# Altium PCB PCB1.PcbDoc
Units mm, origin at the board's own origin, x right, y up, seen from the top; angles counter-clockwise.
Board outline 152.4 x 101.6 mm, 2 copper layers (Top Layer, Bottom Layer); 165 components, 127 nets, 643 pads, 1 vias.
Unrouted connection lines stored in the file: 359.
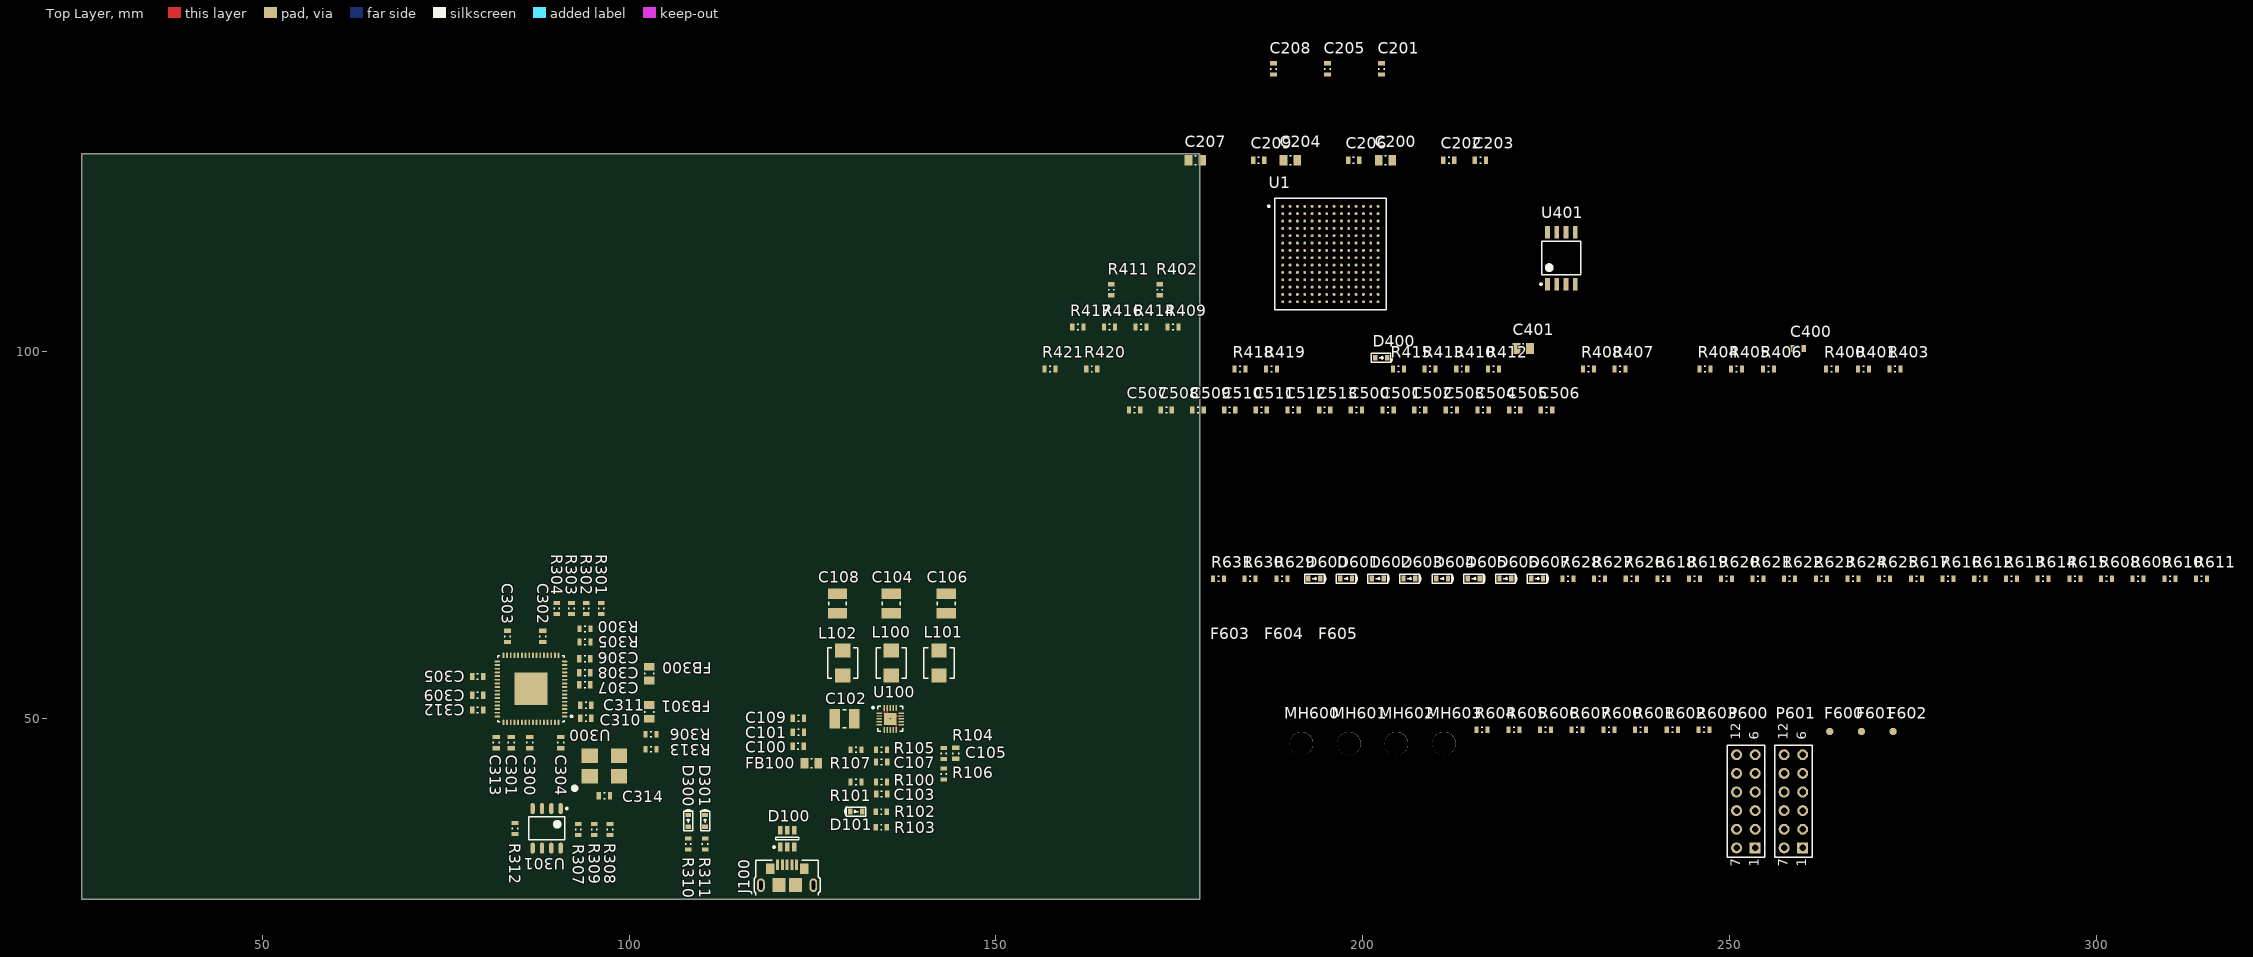
[diagram p0: Top Layer view]
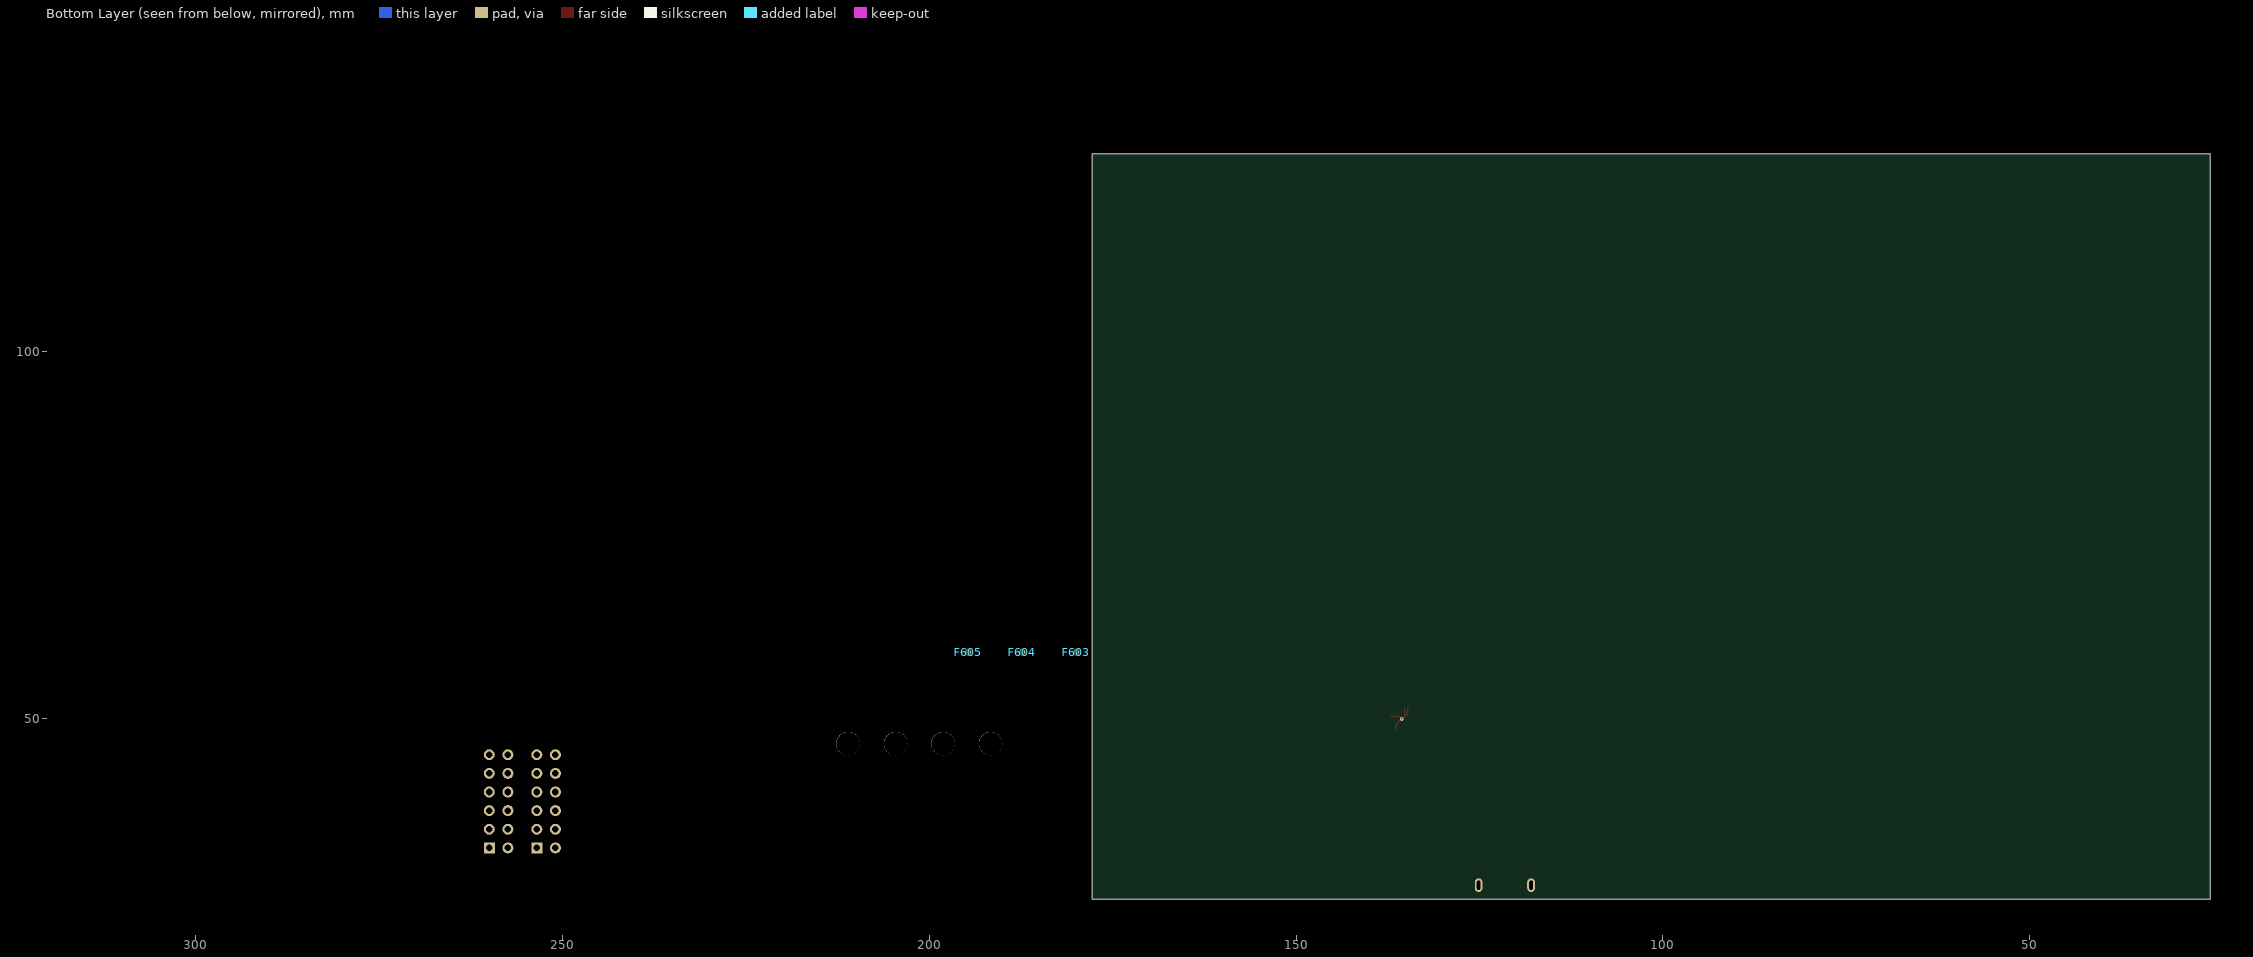
[diagram p1: Bottom Layer view, seen from below]

## Layer stack, top to bottom
Top Solder: solder mask 0.0102, Solder Resist, Dk 3.5
Top Layer: signal copper 0.0356
Dielectric 1: dielectric 0.32, FR-4, Dk 4.8
Bottom Layer: signal copper 0.0356
Bottom Solder: solder mask 0.0102, Solder Resist, Dk 3.5

## Board outline
25.4,25.4 177.8,25.4 177.8,127 25.4,127

## Design rules (kind name [scope] priority, off if disabled: settings)
Clearance [All] p1: gap=0.2 ignorepadtopadclearanceinfootprint=FALSE
DiffPairsRouting [All] p1: maxlimit=0.254 minlimit=0.254 mostfreqgap=0.254 toplayer_minwidth=0.381 toplayer_maxwidth=0.381 toplayer_prefwidth=0.381 bottomlayer_minwidth=0.381 bottomlayer_maxwidth=0.381 bottomlayer_prefwidth=0.381 maxuncoupledlength=12.7
FanoutControl Fanout_BGA [IsBGA] p1: bgadir=Out bgaviamode=Centered fanoutstyle=BGA fanoutdirection=Alternating viagrid=0.025 // Fanout_BGA (Default Rule)
PolygonConnect [All] p1: connectstyle=Relief reliefconductorwidth=0.254 reliefentries=4 polygonreliefangle="90 Angle" airgapwidth=0.254
RoomDefinition U_POWER_SUPPLY [InComponentClass('U_POWER_SUPPLY')] p1: confinementstyle=ConfineIn formatcopy=TRUE lockcomponents=FALSE outline 115.074,22.225 152.622,22.225 152.622,72.443 115.074,72.443
RoomDefinition U_GPIO_Connectors [InComponentClass('U_GPIO_Connectors')] p2: confinementstyle=ConfineIn formatcopy=TRUE lockcomponents=FALSE outline 178.816,25.781 319.544,25.781 319.544,80.391 178.816,80.391
RoomDefinition U_FPGA_BANKS [InComponentClass('U_FPGA_BANKS')] p3: confinementstyle=ConfineIn formatcopy=TRUE lockcomponents=FALSE outline 167.388,87.249 226.951,87.249 226.951,95.631 167.388,95.631
RoomDefinition U_FPGA_POWER [InComponentClass('U_FPGA_POWER')] p4: confinementstyle=ConfineIn formatcopy=TRUE lockcomponents=FALSE outline 162.306,123.573 234.95,123.573 234.95,145.671 162.306,145.671
RoomDefinition U_FPGA_CONFIG [InComponentClass('U_FPGA_CONFIG')] p5: confinementstyle=ConfineIn formatcopy=TRUE lockcomponents=FALSE outline 153.371,96.012 276.307,96.012 276.307,122.682 153.371,122.682
RoomDefinition U_USB [InComponentClass('U_USB')] p6: confinementstyle=ConfineIn formatcopy=TRUE lockcomponents=FALSE outline 115.064,71.249 70.36,71.249 70.36,27.432 115.064,27.432
RoutingVias [All] p1: holewidth=0.711 width=1.27 viastyle="Through Hole" minholewidth=0.15 minwidth=0.25 maxholewidth=0.711 maxwidth=1.27
ShortCircuit ShortCircuit_1 [All] p1: allowed=FALSE
ShortCircuit [All] p2: allowed=FALSE
SolderMaskExpansion [All] p1: expansion=0.102 istentingtop=FALSE
Width [All] p1: maxlimit=10 minlimit=0.1 preferedwidth=0.2 minimp=50.000000 maximp=50.000000 favimp=50.000000
27 further rules are at their usual default settings.

## Classes and differential pairs
component class U_GPIO_Connectors: D600 D601 D602 D603 D604 D605 D606 D607 F600 F601 F602 F603 F604 F605 MH600 MH601 MH602 MH603 P600 P601 R600 R601 R602 R603 R604 R605 R606 R607 R608 R609 R610 R611 R612 R613 R614 R615 R616 R617 R618 R619 R620 R621 R622 R623 R624 R625 R626 R627 R628 R629 R630 R631 SW?
component class U_FPGA_POWER: C200 C201 C202 C203 C204 C205 C206 C207 C208 C209
component class U_FPGA_CONFIG: C400 C401 D400 R400 R401 R402 R403 R404 R405 R406 R407 R408 R409 R410 R411 R412 R413 R414 R415 R416 R417 R418 R419 R420 R421 U1 U401
component class U_USB: C300 C301 C302 C303 C304 C305 C306 C307 C308 C309 C310 C311 C312 C313 C314 D300 D301 FB300 FB301 R300 R301 R302 R303 R304 R305 R306 R307 R308 R309 R310 R311 R312 R313 U300 U301
component class U_POWER_SUPPLY: C101 C102 C103 C104 C105 C106 C107 C108 C109 D100 D101 FB100 J100 L100 L101 L102 R100 R101 R102 R103 R104 R105 R106 R107 U100
component class U_FPGA_BANKS: C500 C501 C502 C503 C504 C505 C506 C507 C508 C509 C510 C511 C512 C513
differential pair USB: +USB_P -USB_N
differential pair D: +D_P -D_N

## Components (designator, comment, footprint, x,y, rotation, side; value= is the part's Value field where it differs from the comment)
C100 "" CAP_0603 123.063,46.228 r0 top value=10n
C101 "" CAP_0603 123.087,48.133 r0 top value=100n
C102 "" CAP_1210 129.381,49.964 r0 top value=22u
C103 "" CAP_0603 134.443,39.735 r0 top value=20p
C104 "" CAP_1210 135.731,65.683 r270 top value=8u
C105 "" CAP_0603 144.546,45.284 r90 top value=20p
C106 "" CAP_1210 143.212,65.683 r270 top value=13u
C107 "" CAP_0603 134.429,44.099 r0 top value=20p
C108 "" CAP_1210 128.416,65.683 r270 top value=8u
C109 "" CAP_0603 123.087,50.038 r0 top value=4.7u
C200 "" CAP_0805 203.092,126.113 r0 top value=47u
C201 "" CAP_0603 202.565,138.559 r90 top value=4.7u
C202 "" CAP_0603 211.728,126.113 r0 top value=0.47u
C203 "" CAP_0603 216.046,126.113 r0 top value=0.47u
C204 "" CAP_0805 190.138,126.113 r0 top value=47u
C205 "" CAP_0603 195.199,138.559 r90 top value=4.7u
C206 "" CAP_0603 198.774,126.113 r0 top value=0.47u
C207 "" CAP_0805 177.184,126.113 r0 top value=100u
C208 "" CAP_0603 187.833,138.559 r90 top value=4.7u
C209 "" CAP_0603 185.82,126.113 r0 top value=0.47u
C300 "" CAP_0603 86.489,46.736 r90 top value=100n
C301 "" CAP_0603 83.949,46.736 r90 top value=100n
C302 "" CAP_0603 88.225,61.206 r270 top value=100n
C303 "" CAP_0603 83.441,61.214 r270 top value=100n
C304 "" CAP_0603 90.68,46.736 r90 top value=100n
C305 "" CAP_0603 79.377,55.753 r0 top value=100n
C306 "" CAP_0603 93.982,58.166 r180 top value=100n
C307 "" CAP_0603 93.982,54.61 r180 top value=4.7u
C308 "" CAP_0603 93.982,56.261 r180 top value=100n
C309 "" CAP_0603 79.377,53.213 r0 top value=100n
C310 "" CAP_0603 94.109,50.038 r180 top value=4.7u
C311 "" CAP_0603 94.109,51.816 r180 top value=100n
C312 "" CAP_0603 79.377,51.181 r0 top value=100n
C313 "" CAP_0603 81.917,46.736 r90 top value=4.7u
C314 "" CAP_0603 96.649,39.497 r180 top value=100n
C400 "" CAP_0603 259.346,100.457 r0 top value=100n
C401 "" CAP_0805 221.881,100.457 r0 top value=100u
C500 "" CAP_0603 199.138,92.075 r0 top value=0.47u
C501 "" CAP_0603 203.456,92.075 r0 top value=0.47u
C502 "" CAP_0603 207.774,92.075 r0 top value=0.47u
C503 "" CAP_0603 212.092,92.075 r0 top value=0.47u
C504 "" CAP_0603 216.41,92.075 r0 top value=4.7u
C505 "" CAP_0603 220.728,92.075 r0 top value=4.7u
C506 "" CAP_0603 225.046,92.075 r0 top value=47u
C507 "" CAP_0603 168.912,92.075 r0 top value=0.47u
C508 "" CAP_0603 173.23,92.075 r0 top value=0.47u
C509 "" CAP_0603 177.548,92.075 r0 top value=0.47u
C510 "" CAP_0603 181.866,92.075 r0 top value=0.47u
C511 "" CAP_0603 186.184,92.075 r0 top value=4.7u
C512 "" CAP_0603 190.502,92.075 r0 top value=4.7u
C513 "" CAP_0603 194.82,92.075 r0 top value=47u
D100 "USBLC6-2SC6" STM-SOT23-6L_V 121.563,33.655 r90 top
D101 "" LED_0603 130.949,37.338 r180 top
D300 "" LED_0603 108.079,36.068 r90 top
D301 "" LED_0603 110.365,36.068 r90 top
D400 "" LED_0603 202.52,99.187 r0 top
D600 "" LED_0603 193.421,69.088 r0 top
D601 "" LED_0603 197.739,69.088 r0 top
D602 "" LED_0603 202.057,69.088 r0 top
D603 "" LED_0603 206.375,69.088 r0 top
D604 "" LED_0603 210.82,69.088 r0 top
D605 "" LED_0603 215.138,69.088 r0 top
D606 "" LED_0603 219.456,69.088 r0 top
D607 "" LED_0603 223.774,69.088 r0 top
F600 "" Fiducial30mil#1 263.652,48.26 r0 top
F601 "" Fiducial30mil#1 267.97,48.26 r0 top
F602 "" Fiducial30mil#1 272.288,48.26 r0 top
F603 "" Fiducial30mil#2 179.959,59.055 r90 top
F604 "" Fiducial30mil#2 187.325,59.055 r90 top
F605 "" Fiducial30mil#2 194.691,59.055 r90 top
FB100 "180R" CAP_0805 124.853,43.942 r0 top
FB300 "180R" CAP_0805 102.745,56.134 r270 top
FB301 "180R" CAP_0805 102.745,50.927 r90 top
J100 "USB B micro" "USB Micro B" 121.551,28.702 r0 top
L100 "" IND4x4mm 135.731,57.584 r90 top value=2.2u
L101 "" IND4x4mm 142.252,57.584 r90 top value=2.2u
L102 "" IND4x4mm 129.116,57.584 r90 top value=2.2u
MH600 "MH" MH3.2mm 191.643,46.609 r0 top
MH601 "MH" MH3.2mm 198.12,46.609 r0 top
MH602 "MH" MH3.2mm 204.597,46.609 r0 top
MH603 "MH" MH3.2mm 211.074,46.609 r0 top
P600 "Header 6X2" HDR2X6_CEN 253.492,32.385 r90 top
P601 "Header 6X2" HDR2X6_CEN 259.969,32.385 r90 top
R100 "" RES_0603 134.426,41.364 r0 top value=4K7
R101 "" RES_0603 130.949,41.364 r0 top value=1K5
R102 "" RES_0603 134.378,37.338 r0 top value=470R
R103 "" RES_0603 134.378,35.179 r0 top value=4K7
R104 "" RES_0603 142.899,45.267 r90 top value=3K
R105 "" RES_0603 134.429,45.75 r0 top value=12K
R106 "" RES_0603 142.904,42.476 r90 top value=12K
R107 "" RES_0603 130.949,45.75 r0 top value=10K
R300 "" RES_0603 93.982,62.23 r0 top value=1K5
R301 "" RES_0603 96.226,65.016 r270 top value=22R
R302 "" RES_0603 94.194,65.016 r270 top value=22R
R303 "" RES_0603 92.162,65.016 r270 top value=22R
R304 "" RES_0603 90.13,65.016 r270 top value=22R
R305 "" RES_0603 93.982,60.452 r180 top value=12K
R306 "" RES_0603 102.999,47.879 r180 top value=12K
R307 "" RES_0603 93.093,34.925 r90 top value=12K
R308 "" RES_0603 97.411,34.925 r90 top value=12K
R309 "" RES_0603 95.252,34.925 r90 top value=12K
R310 "" RES_0603 108.081,32.893 r270 top value=470R
R311 "" RES_0603 110.365,32.893 r270 top value=470R
R312 "" RES_0603 84.457,35.052 r90 top value=1K
R313 "" RES_0603 102.999,45.847 r0 top value=22R
R400 "" RES_0603 263.918,97.663 r0 top value=4K7
R401 "" RES_0603 268.236,97.663 r0 top value=470R
R402 "" RES_0603 172.332,108.458 r90 top value=470R
R403 "" RES_0603 272.554,97.663 r0 top value=4K7
R404 "" RES_0603 246.646,97.663 r0 top value=4K7
R405 "" RES_0603 250.964,97.663 r0 top value=4K7
R406 "" RES_0603 255.282,97.663 r0 top value=4K7
R407 "" RES_0603 235.089,97.663 r0 top value=22R
R408 "" RES_0603 230.771,97.663 r0 top value=22R
R409 "" RES_0603 174.117,103.378 r0 top value=22R
R410 "" RES_0603 213.499,97.663 r0 top value=470R
R411 "" RES_0603 165.728,108.458 r90 top value=470R
R412 "" RES_0603 217.817,97.663 r0 top value=22R
R413 "" RES_0603 209.181,97.663 r0 top value=22R
R414 "" RES_0603 169.799,103.378 r0 top value=22R
R415 "" RES_0603 204.863,97.663 r0 top value=22R
R416 "" RES_0603 165.481,103.378 r0 top value=22R
R417 "" RES_0603 161.163,103.378 r0 top value=22R
R418 "" RES_0603 183.273,97.663 r0 top value=1K
R419 "" RES_0603 187.591,97.663 r0 top value=1K
R420 "" RES_0603 163.068,97.663 r0 top value=1K
R421 "" RES_0603 157.365,97.663 r0 top value=1K
R600 "" RES_0603 233.553,48.514 r0 top value=22R
R601 "" RES_0603 237.871,48.514 r0 top value=22R
R602 "" RES_0603 242.189,48.514 r0 top value=22R
R603 "" RES_0603 246.507,48.514 r0 top value=22R
R604 "" RES_0603 216.281,48.514 r0 top value=22R
R605 "" RES_0603 220.599,48.514 r0 top value=22R
R606 "" RES_0603 224.917,48.514 r0 top value=22R
R607 "" RES_0603 229.235,48.514 r0 top value=22R
R608 "" RES_0603 301.371,69.088 r0 top value=22R
R609 "" RES_0603 305.689,69.088 r0 top value=22R
R610 "" RES_0603 310.007,69.088 r0 top value=22R
R611 "" RES_0603 314.325,69.088 r0 top value=22R
R612 "" RES_0603 284.099,69.088 r0 top value=22R
R613 "" RES_0603 288.417,69.088 r0 top value=22R
R614 "" RES_0603 292.735,69.088 r0 top value=22R
R615 "" RES_0603 297.053,69.088 r0 top value=22R
R616 "" RES_0603 279.781,69.088 r0 top value=12K
R617 "" RES_0603 275.463,69.088 r0 top value=12K
R618 "" RES_0603 240.919,69.088 r0 top value=470R
R619 "" RES_0603 245.237,69.088 r0 top value=470R
R620 "" RES_0603 249.555,69.088 r0 top value=470R
R621 "" RES_0603 253.873,69.088 r0 top value=470R
R622 "" RES_0603 258.191,69.088 r0 top value=470R
R623 "" RES_0603 262.509,69.088 r0 top value=470R
R624 "" RES_0603 266.827,69.088 r0 top value=470R
R625 "" RES_0603 271.145,69.088 r0 top value=470R
R626 "" RES_0603 236.601,69.088 r0 top value=12K
R627 "" RES_0603 232.283,69.088 r0 top value=12K
R628 "" RES_0603 227.965,69.088 r0 top value=12K
R629 "" RES_0603 188.976,69.088 r0 top value=12K
R630 "" RES_0603 184.658,69.088 r0 top value=12K
R631 "" RES_0603 180.34,69.088 r0 top value=12K
U1 "XC7S6-1FTGB196C" FP-XC7S6-1FTGB196C-MFG 195.596,113.324 r0 top
U100 "LTC3569EUD#TRPBF" LT-UD-20_N 135.604,49.964 r0 top
U300 "FT2232HQ-Reel" FP-FT2232HQ-Reel-MFG 86.643,54.06 r180 top
U301 "93LC56B/SN" SOIC8 88.775,35.052 r270 top
U401 "MX25V1635FM2I" SOP-8 227.076,112.776 r90 top
X300 "EC2620TS-12.000M TR" "7x5mm Crystal" 96.649,43.561 r0 top

## Footprints (in the part's own frame and the unit in brackets; to place one, negate y for a bottom-side part, rotate by r counter-clockwise, add the part's x,y. Pads: shape width x height; smd on the part's side, far side on the other; paste and mask are expansions set on the pad)
"7x5mm Crystal" [mm] "12Mhz"
  rect 2.2x2 smd: 1(-1.99,-1.405) 2(1.99,-1.405) 3(1.99,1.405) 4(-1.99,1.405)
  silkscreen extent -4.31,-3.3 -3.81,-2.8, body extent -3.5,-2.5 3.5,2.5, height 1.7
CAP_0603 [mm] "Chip Capacitor, 2-Leads, Body 1,55x0,85mm, IPC Medium Density"
  rect 0.6x1 smd: 1(-0.76,0) 2(0.76,0)
  silkscreen extent -0.1,-0.4 0.1,0.4, body extent -0.78,-0.43 0.77,0.42, height 0.45
CAP_0805 [mm] "Chip Capacitor, 2-Leads, Body 2.00x1.25mm, IPC Medium Density"
  rect 1.05x1.45 smd: 1(-0.925,0) 2(0.925,0)
  silkscreen extent -0.1,-0.63 0.1,0.63, body extent -1.1,-0.72 1.1,0.72, height 1.45
CAP_1210 [mm]
  rect 1.4x2.65 smd: 1(-1.325,0) 2(1.325,0)
  silkscreen extent -0.25,-1.22 0.25,1.23, body extent -1.6,-1.25 1.6,1.25, height 0.55
Fiducial30mil#1 [mm]
  round 1 smd mask+0.5: 1(0,0)
Fiducial30mil#2 [mm]
  round 1 smd far side mask+0.5: 1(0,0)
FP-FT2232HQ-Reel-MFG [mm]
  rrect100% 0.75x0.25 smd paste+0 mask+0: 1(-4.575,3.75) 2(-4.575,3.25) 3(-4.575,2.75) 4(-4.575,2.25) 5(-4.575,1.75) 6(-4.575,1.25) 7(-4.575,0.75) 8(-4.575,0.25) 9(-4.575,-0.25) 10(-4.575,-0.75) 11(-4.575,-1.25) 12(-4.575,-1.75) 13(-4.575,-2.25) 14(-4.575,-2.75) 15(-4.575,-3.25) 16(-4.575,-3.75) 33(4.575,-3.75) 34(4.575,-3.25) 35(4.575,-2.75) 36(4.575,-2.25) 37(4.575,-1.75) 38(4.575,-1.25) 39(4.575,-0.75) 40(4.575,-0.25) 41(4.575,0.25) 42(4.575,0.75) 43(4.575,1.25) 44(4.575,1.75) 45(4.575,2.25) 46(4.575,2.75) 47(4.575,3.25) 48(4.575,3.75)
  rrect100% 0.25x0.75 smd paste+0 mask+0: 17(-3.75,-4.575) 18(-3.25,-4.575) 19(-2.75,-4.575) 20(-2.25,-4.575) 21(-1.75,-4.575) 22(-1.25,-4.575) 23(-0.75,-4.575) 24(-0.25,-4.575) 25(0.25,-4.575) 26(0.75,-4.575) 27(1.25,-4.575) 28(1.75,-4.575) 29(2.25,-4.575) 30(2.75,-4.575) 31(3.25,-4.575) 32(3.75,-4.575) 49(3.75,4.575) 50(3.25,4.575) 51(2.75,4.575) 52(2.25,4.575) 53(1.75,4.575) 54(1.25,4.575) 55(0.75,4.575) 56(0.25,4.575) 57(-0.25,4.575) 58(-0.75,4.575) 59(-1.25,4.575) 60(-1.75,4.575) 61(-2.25,4.575) 62(-2.75,4.575) 63(-3.25,4.575) 64(-3.75,4.575)
  rect 4.45x4.45 smd paste+0 mask+0: 65(0,0)
  silkscreen extent -5.65,-4.5 4.5,4.5, body extent -5.05,-5.05 5.05,5.05, height 0.25
FP-XC7S6-1FTGB196C-MFG [mm]
  round 0.4 smd paste+0 mask+0: A1(-6.5,6.5) A2(-5.5,6.5) A3(-4.5,6.5) A4(-3.5,6.5) A5(-2.5,6.5) A6(-1.5,6.5) A7(-0.5,6.5) A8(0.5,6.5) A9(1.5,6.5) A10(2.5,6.5) A11(3.5,6.5) A12(4.5,6.5) A13(5.5,6.5) A14(6.5,6.5) B1(-6.5,5.5) B2(-5.5,5.5) B3(-4.5,5.5) B4(-3.5,5.5) B5(-2.5,5.5) B6(-1.5,5.5) B7(-0.5,5.5) B8(0.5,5.5) B9(1.5,5.5) B10(2.5,5.5) B11(3.5,5.5) B12(4.5,5.5) B13(5.5,5.5) B14(6.5,5.5) C1(-6.5,4.5) C2(-5.5,4.5) C3(-4.5,4.5) C4(-3.5,4.5) C5(-2.5,4.5) C6(-1.5,4.5) C7(-0.5,4.5) C8(0.5,4.5) C9(1.5,4.5) C10(2.5,4.5) C11(3.5,4.5) C12(4.5,4.5) C13(5.5,4.5) C14(6.5,4.5) D1(-6.5,3.5) D2(-5.5,3.5) D3(-4.5,3.5) D4(-3.5,3.5) D5(-2.5,3.5) D6(-1.5,3.5) D7(-0.5,3.5) D8(0.5,3.5) D9(1.5,3.5) D10(2.5,3.5) D11(3.5,3.5) D12(4.5,3.5) D13(5.5,3.5) D14(6.5,3.5) E1(-6.5,2.5) E2(-5.5,2.5) E3(-4.5,2.5) E4(-3.5,2.5) E5(-2.5,2.5) E6(-1.5,2.5) E7(-0.5,2.5) E8(0.5,2.5) E9(1.5,2.5) E10(2.5,2.5) E11(3.5,2.5) E12(4.5,2.5) E13(5.5,2.5) E14(6.5,2.5) F1(-6.5,1.5) F2(-5.5,1.5) F3(-4.5,1.5) F4(-3.5,1.5) F5(-2.5,1.5) F6(-1.5,1.5) F7(-0.5,1.5) F8(0.5,1.5) F9(1.5,1.5) F10(2.5,1.5) F11(3.5,1.5) F12(4.5,1.5) F13(5.5,1.5) F14(6.5,1.5) G1(-6.5,0.5) G2(-5.5,0.5) G3(-4.5,0.5) G4(-3.5,0.5) G5(-2.5,0.5) G6(-1.5,0.5) G7(-0.5,0.5) G8(0.5,0.5) G9(1.5,0.5) G10(2.5,0.5) G11(3.5,0.5) G12(4.5,0.5) G13(5.5,0.5) G14(6.5,0.5) H1(-6.5,-0.5) H2(-5.5,-0.5) H3(-4.5,-0.5) H4(-3.5,-0.5) H5(-2.5,-0.5) H6(-1.5,-0.5) H7(-0.5,-0.5) H8(0.5,-0.5) H9(1.5,-0.5) H10(2.5,-0.5) H11(3.5,-0.5) H12(4.5,-0.5) H13(5.5,-0.5) H14(6.5,-0.5) J1(-6.5,-1.5) J2(-5.5,-1.5) J3(-4.5,-1.5) J4(-3.5,-1.5) J5(-2.5,-1.5) J6(-1.5,-1.5) J7(-0.5,-1.5) J8(0.5,-1.5) J9(1.5,-1.5) J10(2.5,-1.5) J11(3.5,-1.5) J12(4.5,-1.5) J13(5.5,-1.5) J14(6.5,-1.5) K1(-6.5,-2.5) K2(-5.5,-2.5) K3(-4.5,-2.5) K4(-3.5,-2.5) K5(-2.5,-2.5) K6(-1.5,-2.5) K7(-0.5,-2.5) K8(0.5,-2.5) K9(1.5,-2.5) K10(2.5,-2.5) K11(3.5,-2.5) K12(4.5,-2.5) K13(5.5,-2.5) K14(6.5,-2.5) L1(-6.5,-3.5) L2(-5.5,-3.5) L3(-4.5,-3.5) L4(-3.5,-3.5) L5(-2.5,-3.5) L6(-1.5,-3.5) L7(-0.5,-3.5) L8(0.5,-3.5) L9(1.5,-3.5) L10(2.5,-3.5) L11(3.5,-3.5) L12(4.5,-3.5) L13(5.5,-3.5) L14(6.5,-3.5) M1(-6.5,-4.5) M2(-5.5,-4.5) M3(-4.5,-4.5) M4(-3.5,-4.5) M5(-2.5,-4.5) M6(-1.5,-4.5) M7(-0.5,-4.5) M8(0.5,-4.5) M9(1.5,-4.5) M10(2.5,-4.5) M11(3.5,-4.5) M12(4.5,-4.5) M13(5.5,-4.5) M14(6.5,-4.5) N1(-6.5,-5.5) N2(-5.5,-5.5) N3(-4.5,-5.5) N4(-3.5,-5.5) N5(-2.5,-5.5) N6(-1.5,-5.5) N7(-0.5,-5.5) N8(0.5,-5.5) N9(1.5,-5.5) N10(2.5,-5.5) N11(3.5,-5.5) N12(4.5,-5.5) N13(5.5,-5.5) N14(6.5,-5.5) P1(-6.5,-6.5) P2(-5.5,-6.5) P3(-4.5,-6.5) P4(-3.5,-6.5) P5(-2.5,-6.5) P6(-1.5,-6.5) P7(-0.5,-6.5) P8(0.5,-6.5) P9(1.5,-6.5) P10(2.5,-6.5) P11(3.5,-6.5) P12(4.5,-6.5) P13(5.5,-6.5) P14(6.5,-6.5)
  silkscreen extent -8.52,-7.6 7.6,7.6, body extent -8.1,-8.1 8.1,8.1, height 0.25
HDR2X6_CEN [mm] "Connector; Header; 6x2 Position"
  rect 1.5x1.5 hole 0.9: 1(0,0)
  round 1.5 hole 0.9: 2(2.54,0) 3(5.08,0) 4(7.62,0) 5(10.16,0) 6(12.7,0) 7(0,2.54) 8(2.54,2.54) 9(5.08,2.54) 10(7.62,2.54) 11(10.16,2.54) 12(12.7,2.54)
  silkscreen extent -1.27,-1.27 13.97,3.81
IND4x4mm [mm] "Inductor, 2-Leads, Body 4.06x4.06mm, IPC Medium Density 2.2uH"
  rect 1.9x2.1 smd: 1(-1.725,0) 2(1.725,0)
  silkscreen extent -2.05,-2.05 2.05,2.05, body extent -2.13,-2.03 2.13,2.03, height 2.1
LED_0603 [mm]
  rect 0.6x0.8 smd: 1(-0.819,0) 2(0.8,0)
  silkscreen extent -1.35,-0.61 1.5,0.61, body extent -0.83,-0.35 0.83,0.37, height 0.68
LT-UD-20_N [mm] "QFN, 20-Leads, Body 3.1x3.1mm, Pitch 0.4mm, Thermal Pad 1.65x1.65mm, IPC Medium Density"
  oval 0.8x0.2 smd: 1(-1.5,0.8) 2(-1.5,0.4) 3(-1.5,0) 4(-1.5,-0.4) 5(-1.5,-0.8) 11(1.5,-0.8) 12(1.5,-0.4) 13(1.5,0) 14(1.5,0.4) 15(1.5,0.8)
  oval 0.2x0.8 smd: 6(-0.8,-1.5) 7(-0.4,-1.5) 8(0,-1.5) 9(0.4,-1.5) 10(0.8,-1.5) 16(0.8,1.5) 17(0.4,1.5) 18(0,1.5) 19(-0.4,1.5) 20(-0.8,1.5)
  rect 1.65x1.65 smd: 21(0,0)
  silkscreen extent -2.47,-1.7 1.7,1.7, body extent -1.55,-1.55 1.55,1.55, height 0.8
MH3.2mm [mm]
  round 3.2 hole 3.2 unplated mask+1: 1(0,0)
RES_0603 [mm] "Chip Resistor, 2-Leads, Body 1,55x0,85mm, IPC Medium Density"
  rect 0.55x0.9 smd: 1(-0.75,0) 2(0.75,0)
  silkscreen extent -0.1,-0.35 0.1,0.35, body extent -0.78,-0.43 0.77,0.42, height 0.45
SOIC8 [mm] "SOIC, 8-Leads, Body 4.90x3.90mm, Pitch 1.27mm, IPC Medium Density"
  oval 1.5x0.6 smd: 1(-2.7,1.905) 2(-2.7,0.635) 3(-2.7,-0.635) 4(-2.7,-1.905) 5(2.7,-1.905) 6(2.7,-0.635) 7(2.7,0.635) 8(2.7,1.905)
  silkscreen extent -2.82,-2.45 1.55,2.88, body extent -3,-2.45 3,2.45, height 1.75
SOP-8 [mm]
  rect 1.7x0.65 smd: 1(-3.55,1.905) 2(-3.55,0.635) 3(-3.55,-0.635) 4(-3.55,-1.905) 5(3.55,-1.905) 6(3.55,-0.635) 7(3.55,0.635) 8(3.55,1.905)
  silkscreen extent -3.67,-2.65 2.3,2.9, body extent -3.95,-2.65 3.95,2.65, height 2.16
STM-SOT23-6L_V [mm] "SOT23, 6-Leads, Body 3.05x1.75mm, Pitch 0.95mm"
  rect 1.2x0.6 smd: 1(-1.15,0.95) 2(-1.15,0) 3(-1.15,-0.95) 4(1.15,-0.95) 5(1.15,0) 6(1.15,0.95)
  silkscreen extent -1.27,-1.55 0.15,1.92, body extent -1.6,-1.53 1.6,1.53, height 1.45
"USB Micro B" [mm] "USB3076"
  rect 0.4x1.4 smd: 1(-1.3,1.4) 2(-0.65,1.4) 3(0,1.4) 4(0.65,1.4) 5(1.3,1.4)
  rect 1.15x1.45 smd: 6(-2.32,0.83) 7(2.32,0.83)
  oval 1.05x1.85 hole 1.25 slot 0.45 at 0 deg: 8(-3.575,-1.4) 11(3.575,-1.4)
  rect 1.75x1.9 smd: 9(-1.125,-1.4) 10(1.125,-1.4)
  silkscreen extent -4.5,-2.75 4.5,2, body extent -4.05,-4.1 4.05,1.7, height 2.73

## Part data
C100 C101 C102 C103 C104 C105 C106 C107 C108 C109 C200 C201 C202 C203 C204 C205 C206 C207 C208 C209 C300 C301 C302 C303 C304 C305 C306 C307 C308 C309 C310 C311 C312 C313 C314 C400 C401 C500 C501 C502 C503 C504 C505 C506 C507 C508 C509 C510 C511 C512 C513: library part Cap, "Capacitor", LatestRevisionDate=17-Jul-2002, LatestRevisionNote="Re-released for DXP Platform.", PackageDescription="Radial Cap, Thru-Hole; 2 Leads; 0.3 in Pin Spacing", PackageReference=RAD-0.3, Published=8-Jun-2000, Publisher="Altium Limited"
D100: library part CMP-2000-05378-1, "Very low capacitance ESD protection, 3.5 pF, -40 to 125 degC, 6-Pin SOT23, RoHS, Tape and Reel", Capacitance Value=3.5pF, Clamping Voltage=17V, Leakage Current=0.15uA, Manufacturer=STMicroelectronics, Operating Temp Range=-40Cto125C, Operating Temperature Classification=Automotive, Operating Temperature Max Deg. C=125C, Operating Temperature Min Deg. C=-40C, Package / Case=SOT-23, Package Description="6-Pin Small Outline Transistor, Body 2.925 x 1.625 mm, Pitch 0.95 mm", Package Reference=SOT23-6L, Peak Pulse Current=5A, Reverse Breakdown Voltage=6V, Reverse Stand-off Voltage=5V, Test Current (It)=1mA, Clamping Voltage (Max)=17V, Configuration=Dual, Datasheet URL=http://www.st.com/st-web-ui/static/active/en/resource/technical/document/datasheet/CD00050750.pdf, Datasheet Version="Rev. 5, 10/2011", Direction Type=Uni-Directional, Leakage Current (Max)=0.15uA, Manufacturer URL=http://www.st.com/, Mounting=SurfaceMount, Mounting Style=SurfaceMount, Number of Elements=1, Packaging=TapeandReel, Pin Count=6, Polarity=Uni-Directional, Product Depth (mm)=1.75mm, Product Height (mm)=1.3mm, Product Length (mm)=3.05mm, Rad Hardened=No, Suppressor Type=DiodeArrays, Working Voltage=5V, Working Voltage (Max)=5V
D101 D300 D301 D400 D600 D601 D602 D603 D604 D605 D606 D607: library part LED0, "Typical INFRARED GaAs LED", LatestRevisionDate=08-Jul-2005, LatestRevisionNote="Mech Layer 1 removed.", PackageDescription="LED; 2 Leads", PackageReference=LED-0, Published=8-Jun-2000, Publisher="Altium Limited"
F600 F601 F602 F603 F604 F605: library part Fiducial, "30mil Fiducial"
FB100 FB300 FB301: library part "Ferrite Bead", "Chip Ferrite Bead, 0402, 1000Ω @ 100MHz, 0.65Ω, 25%, 300mA", Case Code (Imperial)=0402, Case Code (Metric)=1005, Current Rating=300mA, DC Current=200mA, DC Resistance (DCR)=650mR, DC Resistance-Max=1R, Frequency=100MHz, Max Operating Temperature=125°C, Min Operating Temperature=-55°C, Package Quantity=1, Tolerance=25%, Case/Package=0402, Core Material=Ferrite, Depth=0.55mm, Height=0.5mm, Impedance=1kR, Lead Free="Lead Free", Length=1mm, Material=Ferrite, Max Current Rating=300mA, Max DC Current=200mA, Military Standard=Not, Number of Circuits=1, Number of Lines=1, Number of Pins=2, Packaging="Tape and Reel", Radiation Hardening=No, REACH SVHC="No SVHC", RoHS Compliant=Yes, Series=BLM15AG_SN, Shielding=Unshielded, Termination=SMD/SMT, Test Frequency=100MHz, Width=0.5mm
J100: library part "USB micro B"
L100 L101 L102: library part Inductor, "Inductor", Code_IEC=1005, Code_JEITA=0402, LatestRevisionDate=29-May-2009, LatestRevisionNote="IPC-7351 Footprint Added.", PackageDescription="Chip Inductor", PackageReference=0402-A, Published=8-Jun-2000, Publisher="Altium Limited"
MH600 MH601 MH602 MH603: "3.2mm mounting hole"
P600 P601: library part "Header 6X2A", "Header, 6-Pin, Dual row", LatestRevisionDate=17-Jul-2002, LatestRevisionNote="Re-released for DXP Platform.", Publisher="Altium Limited"
R100 R101 R102 R104 R105 R106 R107 R300 R301 R302 R303 R304 R305 R306 R307 R308 R309 R310 R311 R312 R313 R400 R401 R402 R403 R404 R405 R406 R407 R408 R409 R410 R411 R412 R413 R414 R415 R416 R417 R418 R419 R420 R421 R600 R601 R602 R603 R604 R605 R606 R607 R608 R609 R610 R611 R612 R613 R614 R615 R616 R617 R618 R619 R620 R621 R622 R623 R624 R625 R626 R627 R628 R629 R630 R631: library part Res2, "Resistor", LatestRevisionDate=17-Jul-2002, LatestRevisionNote="Re-released for DXP Platform.", PackageDescription="Axial Device, Thru-Hole; 2 Leads; 0.4 in Pin Spacing", PackageReference=AXIAL-0.4, Published=8-Jun-2000, Publisher="Altium Limited"
R103: library part Res2, "Wel erop niet assem", LatestRevisionDate=17-Jul-2002, LatestRevisionNote="Re-released for DXP Platform.", PackageDescription="Axial Device, Thru-Hole; 2 Leads; 0.4 in Pin Spacing", PackageReference=AXIAL-0.4, Published=8-Jun-2000, Publisher="Altium Limited"
U1: library part CMP-17530-000008-1, Frequency=200MHz, Manufacturer=Xilinx, Max Junction Temp=+85°C, Max Supply Voltage=3.465V, Min Supply Voltage=0.95V, Temperature="0°C to +85°C", Temperature Range Low=0°C, Automotive=No, Category=IC, ComponentLink2Description=Datasheet, ComponentLink2URL=https://www.xilinx.com/support/documentation/data_sheets/ds189-spartan-7-data-sheet.pdf, Device Class L1="Integrated Circuits (ICs)", Device Class L2="Embedded Processors and Controllers", Device Class L3="FPGAs - Field Programmable Gate Arrays", Digikey Description=XC7S6-1FTGB196C, Footprint Url=https://www.xilinx.com/support/documentation/user_guides/ug475_7Series_Pkg_Pinout.pdf, Height=1.55mm, Ipc Land Pattern Name=BGA196C100P14X14_1500X1500X146, Lead Free=Yes, Manufacturer Part Number=XC7S6-1FTGB196C, Number Of I/Os=100, Number Of Logic Blocks=938, Number Of Logic Elements Cells=6000, Octopart=https://octopart.com/xc7s6-1ftgb196c-xilinx-81890684, Package=XC7S6-1FTGB196C, Propagation Delay=0.13ns, Ram Size=180Kbits, RoHS=TRUE, Speed Grade=1, Standoff Height=0.3mm, Temperature Range High=+85°C
U100: library part CMP-0492-02156-1, "Triple Buck Regulator with 1.2 A and Two 600 mA Outputs and Individual Programmable References, 20-pin QFN (UD-20), -40 to 125 degC, Pb-Free, Tape and Reel", Frequency Adjust Range="1MHz - 3MHz", Manufacturer="Linear Technology", ComponentLink1Description="Manufacturer URL", ComponentLink1URL=http://www.linear.com/, ComponentLink2Description=Datasheet, ComponentLink2URL=http://cds.linear.com/docs/en/datasheet/3569fd.pdf, ComponentLink3Description="Package Specification", ComponentLink3URL=http://cds.linear.com/docs/en/packaging/QFN_20_05-08-1720.pdf, DatasheetVersion="Rev. D", Mounting Technology="Surface Mount", Number of Outputs=3, PackageDescription="20-Pin Plastic QFN, Body 3 x 3 mm, Pitch 0.4 mm", PackageReference=UD-20, PackageVersion="Rev. A, 06/2010", Packing="Tape and Reel", PartNumber=LTC3569EUD#TRPBF, RoHS=TRUE
U300: library part CMP-0078-00004-5, "IC USB HS DUAL UART/FIFO 64-QFN", Ambient Temperature Range High=+85°C, Ambient Temperature Range Low=-40°C, Manufacturer=FTDI, Max Supply Voltage=3.63V, Min Supply Voltage=1.62V, Nominal Supply Current=5-70mA, Package=QFN64, Temperature="-40°C to +85°C", Automotive=No, Category=IC, Ciiva Ids=1315829, ComponentLink2Description=Datasheet, ComponentLink2URL=https://www.ftdichip.com/Support/Documents/DataSheets/ICs/DS_FT2232H.pdf, Data Rate=480Mbits/s, Device Class L1="Integrated Circuits (ICs)", Device Class L2="Interface ICs", Device Class L3="USB Interface ICs", Digikey Description="IC USB HS DUAL UART/FIFO 64-QFN", Footprint Url=https://www.ftdichip.com/Support/Documents/TechnicalNotes/TN_166%20FTDI%20Example%20IC%20PCB%20Footprints.pdf, Height=0.9mm, Import Ts=1521843541, Interface=I2C,SPI,UART,USB,RS-232,RS-485,RS-422,Other, Ipc Land Pattern Name=QFN50P900X900X85-64, Lead Free=Yes, Manufacturer Part Number=FT2232HQ-Reel, Mouser Description="USB Interface IC USB HS to Dual UART/ FIFO/SPI/JTAG/I2C", Number Of Ports=1, Octopart=https://octopart.com/ft2232hq-reel-ftdi-19172126, Release Date=1383921489, RoHS=TRUE, Standoff Height=0mm, Temperature Range High=+85°C, Temperature Range Low=-40°C, Usb Standard="USB 2.0"
U301: library part MEM-SEEPROM-93AA46B-P-8, "2K, 128x16-bit, 2.5V Microwire Serial EEPROM, 8-Pin SOIC 150mil, Commercial Temperature", Code_IPC=SOIC127P600-8, Code_JEDEC=MS-012, DatasheetVersion="revF, May-2008", PackageDescription="8-Lead Plastic Small Outline (SN) - Narrow, 3.90mm Body [SOIC]", PackageReference=SOIC-SN8, PackageVersion="revBB, Aug-2009"
U401: library part "MACRONIX MX25V1635FM2I", "Flash Memory, Serial NOR, 16 Mbit, 2M x 8bit, SPI, SOP, 8 Pins"
X300: library part Oscillator, "12Mhz oscillator"

## Via types
v1: diameter 0.5, hole 0.2, Top Layer to Bottom Layer, 1 vias

## Nets (pads, with @x,y where several pads share a name; then routed paths per layer and width w, separated by ;. In a path a pad name is that pad's centre, name@x,y a point inside that pad or via, vN(x,y) a via of type N, cw(c..) or ccw(c..) an arc to the next point about the centre after c; other vN are vias at no path point)
+1.0V: C105.2 C106.2 C204.2 C205.2 C206.2 C207.2 C208.2 C209.2 L101.2 R104.2 U1.D6 U1.D8 U1.E5 U1.E7 U1.E9 U1.F6 U1.G5 U1.G9 U1.H6 U1.J5 U1.J9 U1.K6 U1.K8 U100.12
+1.8V: C107.2 C108.2 C200.2 C201.2 C202.2 C203.2 C304.2 C305.2 C306.2 C313.2 L102.2 R105.2 U1.F10 U1.H10 U1.K10 U1.L9 U100.13 U300.12 U300.37 U300.49 U300.64
+3.3V: C103.2 C104.2 C300.2 C301.2 C302.2 C303.2 C309.2 C312.2 C314.2 C400.2 C401.2 C500.2 C501.2 C502.2 C503.2 C504.2 C505.2 C506.2 C507.2 C508.2 C509.2 C510.2 C511.2 C512.2 C513.2 FB300.1 FB301.1 L100.2 P600.2 P600.8 P601.2 P601.8 R100.2 R102.2 R103.2 R300.2 R307.1 R308.1 R309.1 R310.2 R311.2 R400.2 R401.2 R402.2 R403.2 R404.2 R405.2 R406.2 R418.2 R419.2 U1.G2 U1.G13 U1.K2 U1.K13 U1.N2 U1.N6 U1.N7 U1.N8 U1.N13 U300.20 U300.31 U300.42 U300.50 U300.56 U301.8 U401.8 X300.1 X300.4
+5: C101.2 C102.2 C109.2 D100.2 FB100.2 U100.2 U100.4 U100.5 U100.9 U100.11 U100.16 U100.17
D_N: D100.6 U300.7
D_P: D100.4 U300.8
DONE: R401.1 R402.1 R410.2 R411.2 U1.P9
FB1: C103.1 R100.1 R101.2 U100.7
FB2: C107.1 R105.1 R107.2 U100.6
FB3: C105.1 R104.1 R106.2 U100.8
FLASH_CLK: R415.2 U1.A8
FLASH_CS: R406.1 U401.1
FLASH_DQ0: R407.2
FLASH_DQ1: R408.2
FLASH_DQ2: R412.2
FLASH_DQ3: R413.2
FTDI_12Mhz: R313.2 X300.3
FTDI_CK: R309.2 U300.62 U301.2
FTDI_CS: R308.2 U300.63 U301.1
FTDI_DI: R312.1 U300.61 U301.3
FTDI_DO: R307.2 R312.2 U301.4
FTDI_OSCI: R313.1 U300.2
FTDI_REF: R306.2 U300.6
FTDI_RESET#: R300.1 R305.2 U300.14
FTDI_TCK: R301.2 U300.16
FTDI_TDI: R302.2 U300.17
FTDI_TDO: R303.2 U300.18
FTDI_TMS: R304.2 U300.19
FTDI_VPHY: C310.2 C311.2 FB301.2 U300.4
FTDI_VPLL: C307.2 C308.2 FB300.2 U300.9
GND: C100.1 C101.1 C102.1 C104.1 C106.1 C108.1 C109.1 C200.1 C201.1 C202.1 C203.1 C204.1 C205.1 C206.1 C207.1 C208.1 C209.1 C300.1 C301.1 C302.1 C303.1 C304.1 C305.1 C306.1 C307.1 C308.1 C309.1 C310.1 C311.1 C312.1 C313.1 C314.1 C400.1 C401.1 C500.1 C501.1 C502.1 C503.1 C504.1 C505.1 C506.1 C507.1 C508.1 C509.1 C510.1 C511.1 C512.1 C513.1 D100.5 D400.2 D600.2 D601.2 D602.2 D603.2 D604.2 D605.2 D606.2 D607.2 J100.5 P600.1 P600.7 P601.1 P601.7 R101.1 R106.1 R107.1 R305.1 R306.1 R420.1 R421.1 U1.A1 U1.A6 U1.A9 U1.A11 U1.A14 U1.B4 U1.B7 U1.B9 U1.C2 U1.C6 U1.C7 U1.C8 U1.C9 U1.C13 U1.D5 U1.D7 U1.D9 U1.D11 U1.E1 U1.E3 U1.E6 U1.E8 U1.E10 U1.E14 U1.F5 U1.F9 U1.G3 U1.G6 U1.G10 U1.G12 U1.H5 U1.H9 U1.J6 U1.J7 U1.J8 U1.J10 U1.K1 U1.K5 U1.K7 U1.K9 U1.K14 U1.L4 U1.L6 U1.L8 U1.L10 U1.L11 U1.N3 U1.N5 U1.N9 U1.N12 U1.P1 U1.P14 U100.10 U100.14 U100.19 U100.20 U100.21 U300.1 U300.5 U300.10 U300.11 U300.13 U300.15 U300.25 U300.35 U300.47 U300.51 U300.65 U301.5 U401.4 X300.2 | length 6.4
  Top Layer w0.2: U100.20 134.804,50.764 U100.21@135.204,50.364 ; U100.19 U100.21@135.204,50.364 ; U100.10 136.404,49.122 136.329,49.197 136.329,49.239 v1(135.604,49.964) ; U100.14 136.004,50.364 v1(135.604,49.964) ; U100.21@135.204,50.364 v1(135.604,49.964)
H1_1: R600.2
H1_2: R604.2
H1_3: R608.2
H1_4: R612.2
H1_5: R601.1
H1_6: R605.1
H1_7: R609.1
H1_8: R613.1
H2_1: R602.2
H2_2: R606.2
H2_3: R610.2
H2_4: R614.2
H2_5: R603.1
H2_6: R607.1
H2_7: R611.1
H2_8: R615.1
INIT_B: R403.1 U1.P8
JTAG: R419.1
LED0: R618.2
LED1: R619.2
LED2: R620.2
LED3: R621.2
LED4: R622.2
LED5: R623.2
LED6: R624.2
LED7: R625.2
LEDONE: D400.1 R410.1 R411.1
M0: R418.1 U1.M7
M1: R420.2 U1.M8
M2: U1.M9
MSPI: R421.2
NetD101_1: D101.1 R102.1
NetD300_1: D300.1 R310.1
NetD301_1: D301.1 R311.1
NetD600_1: D600.1 R618.1
NetD601_1: D601.1 R619.1
NetD602_1: D602.1 R620.1
NetD603_1: D603.1 R621.1
NetD604_1: D604.1 R622.1
NetD605_1: D605.1 R623.1
NetD606_1: D606.1 R624.1
NetD607_1: D607.1 R625.1
NetP600_3: P600.3 R600.1
NetP600_4: P600.4 R604.1
NetP600_5: P600.5 R608.1
NetP600_6: P600.6 R612.1
NetP600_9: P600.9 R601.2
NetP600_10: P600.10 R605.2
NetP600_11: P600.11 R609.2
NetP600_12: P600.12 R613.2
NetP601_3: P601.3 R602.1
NetP601_4: P601.4 R606.1
NetP601_5: P601.5 R610.1
NetP601_6: P601.6 R614.1
NetP601_9: P601.9 R603.2
NetP601_10: P601.10 R607.2
NetP601_11: P601.11 R611.2
NetP601_12: P601.12 R615.2
NetR404_1: R404.1 R412.1 U401.3
NetR405_1: R405.1 R413.1 U401.7
NetR407_1: R407.1 U401.5
NetR408_1: R408.1 U401.2
NetR616_2: R616.2
NetR617_2: R617.2
NetR626_2: R626.2
NetR627_2: R627.2
NetR628_2: R628.2
NetR629_2: R629.2
NetR630_2: R630.2
NetR631_2: R631.2
PGOOD: D101.2 R103.1 U100.3
PROGRAM_B: R400.1 U1.L7
QSPI_CLK: R415.1 U401.6
RX_LED: D301.2 U300.55
SW0: R616.1
SW1: L100.1 R617.1 U100.18
SW2: L102.1 R626.1 U100.1
SW3: L101.1 R627.1 U100.15
SW4: R628.1
SW5: R629.1
SW6: R630.1
SW7: R631.1
TCK: R301.1 R409.2
TCKFPGA: R409.1 U1.A7
TDI: R302.1 R414.2
TDIFPGA: R414.1 U1.P7
TDO: R303.1 R416.2
TDOFPGA: R416.1 U1.P6
TMS: R304.1 R417.2
TMSFPGA: R417.1 U1.M6
TX_LED: D300.2 U300.54
UART0_RX: U300.38
UART0_TX: U300.39
USB_N: D100.1 J100.2
USB_P: D100.3 J100.3
USBV: C100.2 FB100.1 J100.1
pads on no net: F600.1 F601.1 F602.1 F603.1 F604.1 F605.1 J100.4 J100.6 J100.7 J100.8 J100.9 J100.10 J100.11 MH600.1 MH601.1 MH602.1 MH603.1 U1.A2 U1.A3 U1.A4 U1.A5 U1.A10 U1.A12 U1.A13 U1.B1 U1.B2 U1.B3 U1.B5 U1.B6 U1.B8 U1.B10 U1.B11 U1.B12 U1.B13 U1.B14 U1.C1 U1.C3 U1.C4 U1.C5 U1.C10 U1.C11 U1.C12 U1.C14 U1.D1 U1.D2 U1.D3 U1.D4 U1.D10 U1.D12 U1.D13 U1.D14 U1.E2 U1.E4 U1.E11 U1.E12 U1.E13 U1.F1 U1.F2 U1.F3 U1.F4 U1.F7 U1.F8 U1.F11 U1.F12 U1.F13 U1.F14 U1.G1 U1.G4 U1.G7 U1.G8 U1.G11 U1.G14 U1.H1 U1.H2 U1.H3 U1.H4 U1.H7 U1.H8 U1.H11 U1.H12 U1.H13 U1.H14 U1.J1 U1.J2 U1.J3 U1.J4 U1.J11 U1.J12 U1.J13 U1.J14 U1.K3 U1.K4 U1.K11 U1.K12 U1.L1 U1.L2 U1.L3 U1.L5 U1.L12 U1.L13 U1.L14 U1.M1 U1.M2 U1.M3 U1.M4 U1.M5 U1.M10 U1.M11 U1.M12 U1.M13 U1.M14 U1.N1 U1.N4 U1.N10 U1.N11 U1.N14 U1.P2 U1.P3 U1.P4 U1.P5 U1.P10 U1.P11 U1.P12 U1.P13 U300.3 U300.21 U300.22 U300.23 U300.24 U300.26 U300.27 U300.28 U300.29 U300.30 U300.32 U300.33 U300.34 U300.36 U300.40 U300.41 U300.43 U300.44 U300.45 U300.46 U300.48 U300.52 U300.53 U300.57 U300.58 U300.59 U300.60 U301.6 U301.7

## Text inside footprints (layer, text, board x,y; h text height)
P600: Top Overlay "7" at 251.46,29.845 h1.27 r90; Top Overlay "1" at 254,29.845 h1.27 r90; Top Overlay "6" at 254,47.117 h1.27 r90; Top Overlay "12" at 251.46,47.117 h1.27 r90
P601: Top Overlay "7" at 257.937,29.845 h1.27 r90; Top Overlay "1" at 260.477,29.845 h1.27 r90; Top Overlay "6" at 260.477,47.117 h1.27 r90; Top Overlay "12" at 257.937,47.117 h1.27 r90